# EAGLE board 4x1.35 (EAGLE 6.4)

Size 101.6 x 34.29 mm. Coordinates in mm from the lower left corner, seen from the top.
Outline: 0,0 0,34.29 101.6,34.29 101.6,0 0,0
Copper layers (1*16): Top 0.035mm / dielectric 1.5mm / Bottom 0.035mm
Design rules "default": minimum track width 10mil, minimum drill 24mil, track to track 8mil, track to pad 8mil, pad to pad 8mil, via to via 8mil, smd to smd 8mil, copper to edge 40mil, drill to drill 8mil, minimum pad ring 10mil, minimum via ring 8mil, stop-mask expansion 4mil, vias tented up to drill 0mil, thermal gap 10mil

## Footprints (pad centres in the part's own frame; a part is rotated, then mirrored left to right if it is on the bottom)
2,8 = hole 2.8: 0,0

## Placement (x,y rotation side)
E$1  [2,8]  5.08,29.21 0 top
E$2  [2,8]  96.52,5.08 0 top
E$3  [2,8]  55.88,29.21 0 top
E$4  [2,8]  45.72,5.08 0 top

## Library data of the parts
E$1-E$4 = holes